# EAGLE board openusbfxs (EAGLE 5.03)
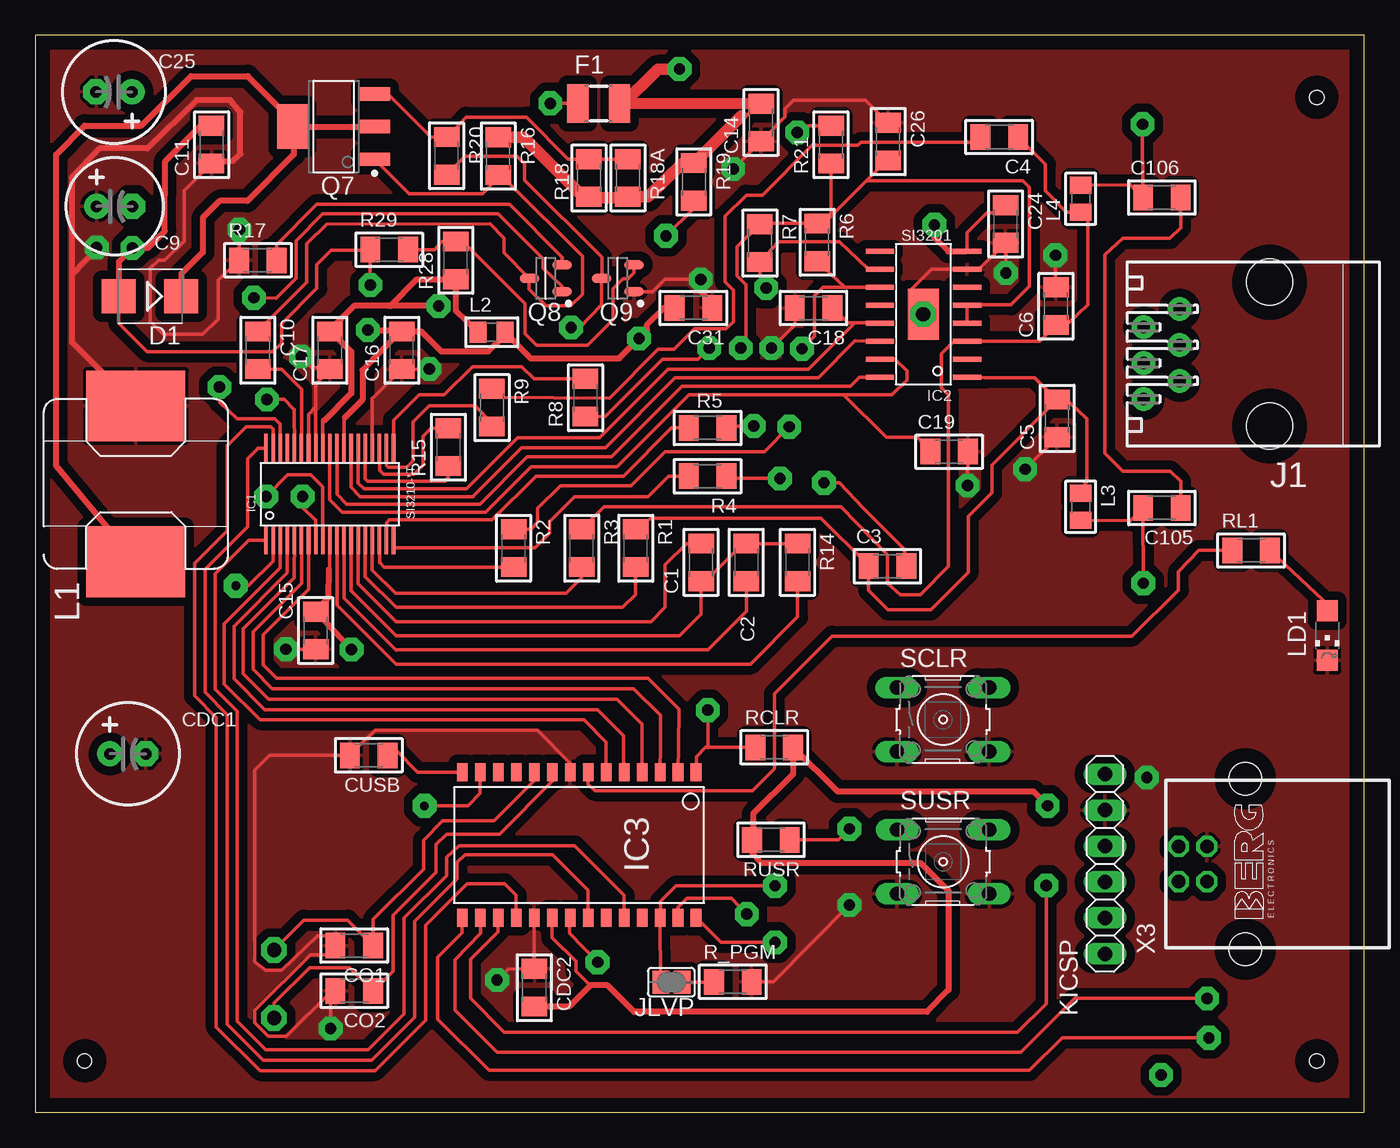
[diagram p0: board, top side]
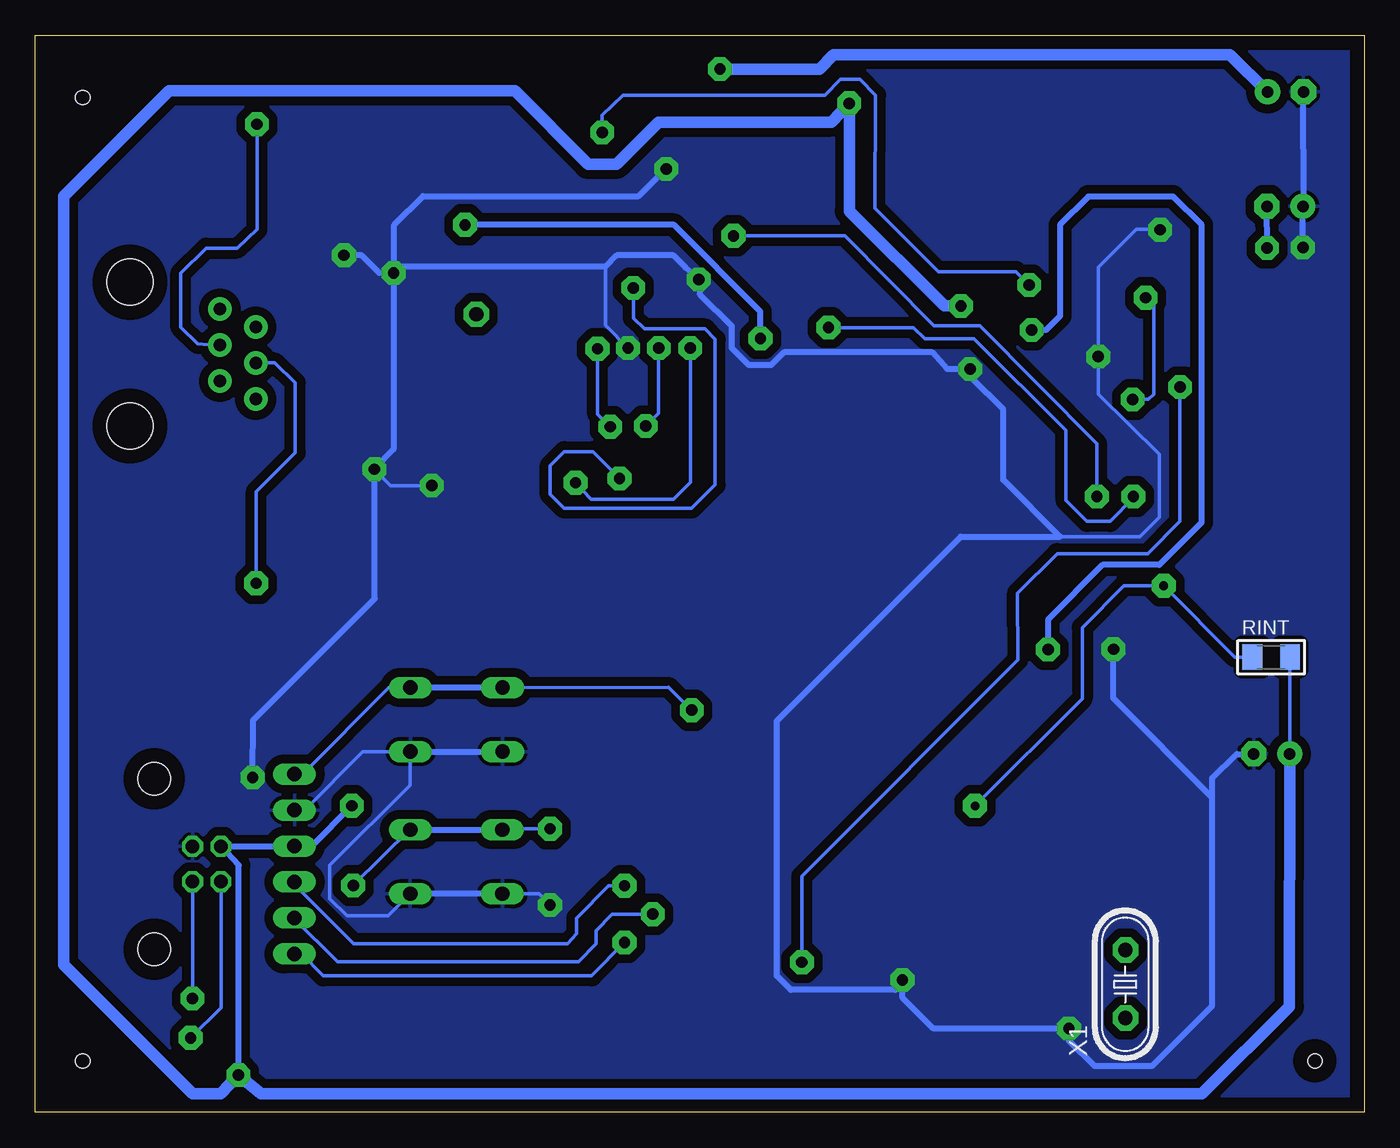
[diagram p1: board, bottom side, seen from below]

Size 93.81 x 76 mm. Coordinates in mm from the lower left corner, seen from the top.
Outline: 0,0 93.81,0 93.81,76 0,76 0,0
Copper layers (1*16): Top 0.035mm / dielectric 1.5mm / Bottom 0.035mm
Design rules "default": minimum track width 10mil, minimum drill 24mil, track to track 8mil, track to pad 8mil, pad to pad 8mil, via to via 8mil, smd to smd 8mil, copper to edge 40mil, drill to drill 8mil, minimum pad ring 10mil, minimum via ring 8mil, stop-mask expansion 4mil, vias tented up to drill 0mil, thermal gap 10mil
Holes 1 mm at 90.47,71.63 90.47,3.63 3.47,3.63

## Footprints (pad centres in the part's own frame; a part is rotated, then mirrored left to right if it is on the bottom)
C1206 = smd 1.4 x 1.8: 1 -1.329,0; 2 1.329,0
CE-025X060 = drill 0.813 pad 1.778 round: + -1.27,0 | drill 0.813 pad 1.778 octagon: - 1.27,0
CE-025X065 = drill 0.813 pad 1.778 round: + -1.27,0 | drill 0.813 pad 1.778 octagon: - 1.27,0
SMB = smd 2.4 x 2.4: A 2.2,0; C -2.2,0
1210 = smd 1.5 x 2.7: 1 -1.5,0; 2 1.45,0
TSSOP38-LP = smd 0.25 x 2: 1 -4.5,-3.25; 2 -4,-3.25; 3 -3.5,-3.25; 4 -3,-3.25; 5 -2.5,-3.25; 6 -2,-3.25; 7 -1.5,-3.25; 8 -1,-3.25; 9 -0.5,-3.25; 10 0,-3.25; 11 0.5,-3.25; 12 1,-3.25; 13 1.5,-3.25; 14 2,-3.25; 15 2.5,-3.25; 16 3,-3.25; 17 3.5,-3.25; 18 4,-3.25; 19 4.5,-3.25; 20 4.5,3.25; 21 4,3.25; 22 3.5,3.25; 23 3,3.25; 24 2.5,3.25; 25 2,3.25; 26 1.5,3.25; 27 1,3.25; 28 0.5,3.25; 29 0,3.25; 30 -0.5,3.25; 31 -1,3.25; 32 -1.5,3.25; 33 -2,3.25; 34 -2.5,3.25; 35 -3,3.25; 36 -3.5,3.25; 37 -4,3.25; 38 -4.5,3.25 | smd 0.25 x 1: P$25 -3.5,-2.75
ESOIC-16T = smd 0.35 x 2: 1 -4.445,-3.075; 2 -3.175,-3.075; 3 -1.905,-3.075; 4 -0.635,-3.075; 5 0.635,-3.075; 6 1.905,-3.075; 7 3.175,-3.075; 8 4.445,-3.075; 9 4.445,3.075; 10 3.175,3.075; 11 1.905,3.075; 12 0.635,3.075; 13 -0.635,3.075; 14 -1.905,3.075; 15 -3.175,3.075; 16 -4.445,3.075 | smd 3.6 x 2.2: THERMAL 0,0
SO-28W = smd 0.762 x 1.27: 1 -7.62,-5.207; 2 -6.35,-5.207; 3 -5.08,-5.207; 4 -3.81,-5.207; 5 -2.54,-5.207; 6 -1.27,-5.207; 7 0,-5.207; 8 1.27,-5.207; 9 2.54,-5.207; 10 3.81,-5.207; 11 5.08,-5.207; 12 6.35,-5.207; 13 7.62,-5.207; 14 8.89,-5.207; 15 8.89,5.08; 16 7.62,5.08; 17 6.35,5.08; 18 5.08,5.08; 19 3.81,5.08; 20 2.54,5.08; 21 1.27,5.08; 22 0,5.08; 23 -1.27,5.08; 24 -2.54,5.08; 25 -3.81,5.08; 26 -5.08,5.08; 27 -6.35,5.08; 28 -7.62,5.08
RJ-11/12 = drill 0.889 pad 1.676 round: 1 -3.175,7.747; 2 -1.905,5.207; 3 -0.635,7.747; 4 0.635,5.207; 5 1.905,7.747; 6 3.175,5.207 | hole 3.251: -5.08,-1.143; 5.08,-1.143
SJ = smd 1.168 x 1.6: 1 -0.762,0; 2 0.762,0
1X06 = drill 1.016 long: 1 -6.35,0; 2 -3.81,0; 3 -1.27,0; 4 1.27,0; 5 3.81,0; 6 6.35,0
SMD_SC = smd 5 x 7: P$1 -5.5,0; P$2 5.5,0
L0805 = smd 1.2 x 1.5: 1 -0.953,0; 2 0.953,0
CHIPLED_1206 = smd 1.5 x 1.5: A 0,-1.75; C 0,1.75
SOT230P700X160-4N = smd 2.15 x 0.95: 1 -2.9,2.3; 2 -2.9,0; 3 -2.9,-2.3 | smd 2.15 x 3.15: 4 2.9,0
SOT95P280X135-3N = smd 1.4 x 0.65: 1 -1.15,0.95; 2 -1.15,-0.95; 3 1.15,0
R1206 = smd 1.4 x 1.8: 1 -1.329,0; 2 1.329,0
B3F-10XX = drill 1.016 long: 1 -3.251,2.261; 2 3.251,2.261; 3 -3.251,-2.261; 4 3.251,-2.261
HC49/S = drill 0.813 round: 1 -2.413,0; 2 2.413,0
PN61729 = drill 0.95 octagon: 1 1.25,4.71; 2 -1.25,4.71; 3 -1.25,2.71; 4 1.25,2.71 | hole 2.3: -6.02,0; 6.02,0

## Placement (x,y rotation side)
C1  10uF/6V  [C1206]  47,38.81 90 top
C2  10uF/6V  [C1206]  50.19,38.81 270 top
C3  220nF/100V  [C1206]  60.16,38.54 0 top
C4  220nF/100V  [C1206]  68.05,68.83 180 top
C5  22nF/100V  [C1206]  72.13,48.97 90 top
C6  22nF/100V  [C1206]  72.05,56.89 90 top
C9  10uF/100V  [CE-025X060]  5.59,63.94 0 top
C10  100nF/50V  [C1206]  15.71,53.78 270 top
C11  100nF/100V  [C1206]  12.44,68.29 90 top
C14  100nF/25V  [C1206]  51.23,69.86 90 top
C15  100nF  [C1206]  19.79,34 90 top
C16  100nF  [C1206]  25.87,53.78 90 top
C17  100nF  [C1206]  20.79,53.78 90 top
C18  4.7uF/6V  [C1206]  54.94,56.76 180 top
C19  4.7uF/6V  [C1206]  64.51,46.62 0 top
C24  100nF  [C1206]  68.5,62.69 270 top
C25  10uF/25VTant  [CE-025X065]  5.55,72.02 180 top
C26  100nF/100V  [C1206]  60.2,68.5 270 top
C31  10uF/6V  [C1206]  46.45,56.77 180 top
C105  680pF/100V  [C1206]  79.53,42.65 180 top
C106  680pF/100V  [C1206]  79.53,64.56 0 top
CDC1  100uF/10VRadial  [CE-025X065]  6.52,25.3 0 top
CDC2  100nF/25V  [C1206]  35.23,8.79 270 top
CO1  22pF  [C1206]  22.51,11.76 180 top
CO2  22pF  [C1206]  22.51,8.57 180 top
CUSB  220nF  [C1206]  23.54,25.19 180 top
D1  ES1D  [SMB]  8.09,57.59 180 top
F1  1.25A  [1210]  39.74,71.2 180 top
IC1  SI3210-*T  [TSSOP38-LP]  20.79,43.62 0 top
IC2  SI3201  [ESOIC-16T]  62.7,56.32 90 top
IC3  PIC18F2550-I/SO  [SO-28W]  39.03,18.79 180 top
J1  [RJ-11/12]  85.99,53.51 90 top
JLVP  [SJ]  44.9,9.17 180 top
KICSP  [1X06]  75.52,17.52 270 top
L1  100uH*  [SMD_SC]  7.09,44.35 90 top
L2  BLM18AG601SN1  [L0805]  32.22,55.05 0 top
L3  BLM18AG601SN1  [L0805]  73.8,42.73 270 top
L4  BLM18AG601SN1  [L0805]  73.8,64.48 90 top
LD1  [CHIPLED_1206]  91.21,33.65 180 top
Q7  FZT953  [SOT230P700X160-4N]  21.06,69.56 180 top
Q8  MMBT2222A  [SOT95P280X135-3N]  36.03,58.86 180 top
Q9  MMBT2222A  [SOT95P280X135-3N]  41.11,58.86 180 top
R1  200k  [R1206]  42.38,39.81 270 top
R2  196k  [R1206]  33.76,39.81 270 top
R3  200k  [R1206]  38.57,39.81 270 top
R4  196k  [R1206]  47.46,44.89 180 top
R5  200k  [R1206]  47.46,48.3 180 top
R6  4.02k  [R1206]  55.19,61.4 270 top
R7  4.02k  [R1206]  51.15,61.34 270 top
R8  470  [R1206]  38.84,50.43 90 top
R9  470  [R1206]  32.24,49.73 270 top
R14  40.2k  [R1206]  53.81,38.81 270 top
R15  243  [R1206]  29.16,46.94 90 top
R16  200  [R1206]  32.68,67.48 270 top
R17  450*  [R1206]  15.71,60.13 0 top
R18  1/0.125W*  [R1206]  39.08,65.94 270 top
R18A  1/0.125W*  [R1206]  41.84,65.94 270 top
R19  18k  [R1206]  46.49,65.66 270 top
R20  18k  [R1206]  29.04,67.5 270 top
R21  15/0.25W  [R1206]  56.17,68.29 90 top
R28  37.4k*  [R1206]  29.68,60.13 90 top
R29  450k*  [R1206]  24.98,60.88 0 top
R_PGM  10k  [R1206]  49.24,9.21 0 top
RCLR  10k  [R1206]  52.16,25.76 0 top
RINT  10k  [R1206]  6.56,32.12 0 bottom
RL1  330  [R1206]  85.83,39.65 0 top
RUSR  10k  [R1206]  51.93,19.23 180 top
SCLR  [B3F-10XX]  64.08,27.71 0 top
SUSR  [B3F-10XX]  64.09,17.68 0 top
X1  20MHz  [HC49/S]  16.86,9.03 90 bottom
X3  [PN61729]  85.42,17.52 90 top

## Library data of the parts
C1-C6 C9-C11 C14-C19 C24-C26 C31 C105 C106 CDC1 CDC2 CO1 CO2 CUSB L2-L4 R1-R9 R14-R18 R18A R19-R21 R28 R29 R_PGM RCLR RINT RL1 RUSR = rc-master
D1 = diode
F1 = m-pad-2.0
IC1 IC2 = Silabs
IC3 = microchip-pic18fxx5x
J1 = connectors
JLVP = jumper
KICSP = pinhead
L1 = ShieldedChoke
LD1 = led
Q7-Q9 = ipc-7351-transistor
SCLR SUSR = switch-omron
X1 = crystal
X3 = con-berg

## Nets
!INT: IC1.2 IC3.13 RINT.1
!RESET: IC1.7 IC3.2
!SCS: IC1.1 IC3.24
+5V: C17.2 CDC1.+ CDC2.2 F1.2 IC1.30 IC3.20 KICSP.3 L2.1 R28.1 RCLR.2 RINT.2 RUSR.2 X3.1
DRX: IC1.4 IC3.5
DTX: IC1.5 IC3.4
FSYNC: IC1.6 IC3.3
GND: C5.1 C6.2 C9.+ C11.1 C14.1 C15.1 C16.1 C17.1 C18.2 C19.2 C24.2 C25.- C26.1 C31.1 CDC1.- CDC2.1 CO1.2 CO2.2 CUSB.2 IC1.23 IC1.31 IC1.32 IC2.7 IC3.8 IC3.19 KICSP.2 L1.P$2 LD1.C Q9.1 R17.1 R_PGM.2 SCLR.3 SCLR.4 SUSR.3 SUSR.4 X3.4
N$1: IC1.15 R1.2
N$2: IC1.17 R2.2
N$3: IC1.18 R5.2
N$4: IC1.19 R4.2
N$5: IC1.16 R3.2
N$6: IC2.11 R2.1 R6.2
N$7: IC2.10 R4.1 R7.2
N$8: IC1.28 IC2.16
N$9: IC1.26 IC2.14
N$10: C19.1 IC1.29 IC2.15
N$11: C18.1 IC1.25 IC2.13
N$12: IC3.15 X3.2
N$13: IC1.20 R8.2
N$14: IC1.21 R9.2
N$15: LD1.A RL1.2
N$16: C3.1 C5.2 IC2.1 L3.1 R1.1
N$17: C4.1 C6.1 IC2.3 L4.1 R3.1
N$18: C1.1 C2.1 IC1.13 R14.1
N$19: C1.2 IC1.14
N$20: C2.2 IC1.12
N$21: IC1.11 R14.2
N$22: C3.2 R8.1
N$23: C4.2 R9.1
N$24: IC1.24 R15.1
N$25: Q8.2 R17.2
N$26: C9.- C11.2 D1.A R21.2 R29.1
N$27: Q9.2 R28.2 R29.2
N$28: IC1.9 Q9.3 R20.2
N$29: IC1.8 R19.2
N$30: Q7.3 R18.1 R18A.1 R20.1
N$31: C14.2 C25.+ F1.1 R16.1 R18.2 R18A.2 R19.1
N$32: IC1.34 Q8.1
N$34: C10.2 IC1.33
N$35: IC3.16 X3.3
N$36: C10.1 Q7.1 Q8.3 R16.2
N$37: D1.C L1.P$1 Q7.2
N$38: IC3.28 KICSP.6
N$39: IC3.1 KICSP.1 RCLR.1 SCLR.1 SCLR.2
N$40: IC3.27 KICSP.5
N$41: IC3.26 JLVP.2 KICSP.4
N$42: JLVP.1 R_PGM.1
N$43: CO1.1 IC3.10 X1.2
N$44: CO2.1 IC3.9 X1.1
N$45: CUSB.1 IC3.14
N$46: C105.2 J1.3 L3.2
N$47: C106.1 J1.4 L4.2
N$48: IC3.7 RL1.1
N$50: IC3.17 RUSR.1 SUSR.1 SUSR.2
PCLK: IC1.3 IC3.6
PE: C105.1 C106.2
R15: IC1.22 R15.2
SCK: IC1.38 IC3.22
SDI: IC1.36 IC3.21
SDO: IC1.37 IC3.18
VBATH: C26.2 IC2.4 IC2.5 R5.1 R6.1 R7.1 R21.1
VCHK: C15.2 C16.2 C24.1 C31.2 IC1.10 IC1.27 IC2.8 L2.2

## Tracks (layer width: path | path; a pad name or v marks a point on that pad's centre or on a via)
!INT  (via drill 0.6 pad 1.68)
  Top 0.254: IC1.2 16.79,38.96 16.79,38.91 15.04,37.15 v14.16,37.15 | v27.47,21.63 30.47,21.63 30.54,21.63 31.41,22.5 IC3.13
  Bottom 0.254: v27.47,21.63 19.9,29.2 19.9,34.21 16.95,37.15 v14.16,37.15 9.12,32.12 RINT.1
!RESET
  Top 0.25: 19.29,37.12 IC1.7
  Top 0.254: IC3.2 45.42,25.86 45.45,28.43 43.27,30.63 17.02,30.63 16.07,31.58 16.07,33.69 19.29,36.91 19.29,37.12
!SCS
  Top 0.254: IC3.24 41.57,15.31 38.07,18.8 29.92,18.8 29.04,18 29.04,16.7 26.04,13.73 26.04,6.96 23.49,4.41 16.25,4.41 14.25,6.41 14.25,28.29 12.7,29.86 12.69,29.86 12.69,37.96 12.69,37.99 15.07,40.37 IC1.1
+5V  (via drill 0.8 pad 1.68)
  Top 0.2: 20.29,48.7 20.38,48.81 20.29,48.74
  Top 0.25: 20.29,48.74 IC1.30
  Top 0.254: 20.92,55.05 C17.2 20.74,55.16 | R28.1 29.67,58.73 | 25.07,56.93 25.12,56.91 24.95,56.91 | v36.34,71.2 F1.2 | 50.67,19.25 RUSR.2 50.59,18.3 | 36.47,13.63 IC3.20 36.47,13.73 36.47,12.31 38.17,10.66 38.17,9.96 39.14,8.96 39.14,8.93
  Top 0.406: 20.38,48.81 22.29,50.73 22.29,53.68 20.92,55.05 | L2.1 29.67,56.58 29.67,58.73 | R28.1 26.92,58.78 25.07,56.93 | 25.12,56.91 22.5,56.91 20.74,55.16 | v28.47,56.91 24.95,56.91 | v71.47,21.63 70.5,22.63 56.64,22.63 RCLR.2 53.49,23.86 50.67,21.05 50.67,19.25 | 50.59,18.3 51.27,17.61 62.47,17.61 64.47,15.63 64.47,8.63 62.95,7.08 42.27,7.08 40.39,8.96 39.14,8.96 | CDC2.2 37.67,7.46 39.14,8.93
  Bottom 0.254: KICSP.3 76.55,18.78 | 79.59,2.73 v79.47,2.63 | 36.32,71.23 v36.34,71.2 | RINT.2 5.23,25.32 CDC1.+
  Bottom 0.406: v79.47,2.63 79.47,17.4 79.45,17.42 X3.1 75.55,18.77 KICSP.3 | v71.47,21.63 74.3,18.78 76.55,18.78
  Bottom 0.813: v36.34,71.2 36.34,63.61 29.62,56.91 v28.47,56.91 | CDC1.+ 5.27,7.46 11.45,1.31 77.87,1.31 79.59,2.73 | v79.47,2.63 80.72,1.31 82.72,1.31 91.8,10.41 91.8,64.66 84.37,72.1 59.95,72.1 54.8,66.91 52.8,66.91 49.82,69.88 37.59,69.88 36.32,71.23
DRX
  Top 0.25: 17.79,38.53 IC1.4
  Top 0.254: IC3.5 41.52,23.98 41.52,26.58 39.7,28.4 16.2,28.4 14.02,30.58 14.03,30.59 14.03,34.3 17.79,38.06 17.79,38.53
DTX
  Top 0.25: 18.29,38.02 IC1.5
  Top 0.254: IC3.4 42.82,27.43 42.8,27.43 41.07,29.15 16.47,29.15 14.67,30.95 14.68,30.96 14.68,34.11 18.29,37.72 18.29,38.02
FSYNC
  Top 0.25: IC1.6 18.79,37.47 18.79,37.37
  Top 0.254: IC3.3 44.12,25.95 44.12,28 42.22,29.9 16.72,29.9 15.37,31.28 15.37,31.29 15.37,33.92 18.79,37.35 18.79,37.37
GND  (via drill 0.8 pad 1.68)
  Top 0.2: 23.79,50.38 | C17.1 20.81,52.42
  Top 0.25: 23.79,50.38 IC1.23 | 19.79,49.78 IC1.31 | 19.29,49.27 IC1.32
  Top 0.254: 47.92,57.01 C31.1 | 53.57,56.73 C18.2 53.62,56.73 53.62,55.58 v51.97,53.93 | v65.82,44.23 C19.2 | C5.1 72.07,47.58 v69.87,45.38 | v68.52,59.23 68.52,60.88 C24.2 68.37,61.23 66.62,59.48 IC2.7 65.69,59.51 63.27,59.51 61.74,57.98 | C6.2 72.02,58.38 v72.02,60.48 | 20.77,52.43 C17.1 19.47,52.63 v18.77,53.33 | 23.79,50.38 C16.1 v27.82,52.46 | Q9.1 43.57,57.91 44.45,58.78 v46.97,58.78 | v49.27,66.58 C14.1 51.22,68.5 52.92,70.25 52.92,70.83 53.52,71.43 58.62,71.43 C26.1 | IC3.8 37.74,24.63 35.45,26.95 23.97,26.95 22.14,25.18 CUSB.2 22.2,25.18 16.54,25.18 15.5,24.14 15.5,12.23 15.5,10.63 16.27,10.01 17.39,10.01 19.92,12.46 20.52,12.46 CO1.2 20.49,11.11 19.42,11.11 15.5,7.21 15.5,6.3 16.42,5.35 17.7,5.35 20.92,8.55 21.17,8.55 CO2.2 20.84,8.48 v20.84,5.91 | LD1.C 91.47,31.63 | R_PGM.2 52.12,9.21 v57.47,14.63 | v17.7,32.68 C15.1 | IC3.19 35.22,10.08 CDC2.1 33.37,10.11 v32.59,9.33 | v14.4,62.28 R17.1 14.32,60.08 12.92,58.71 12.92,55.98 11.82,54.91 9.02,54.91 8.12,55.83 8.12,59.55 8.7,60.13 9.15,60.13 10.5,61.48 10.5,65.03 C11.1 12.54,67.1 | L1.P$2 7.09,49.83 | 2.57,59.36 2.59,59.16 | 4.37,60.98 v4.32,61.03 | 20.81,52.42 19.79,51.4 19.79,49.78 19.29,49.27
  Top 0.406: 47.92,57.01 46.97,57.96 v46.97,58.78 | 12.54,67.1 13.97,67.16 14.47,67.63 14.47,70.58 13.75,71.43 11.37,71.43 7.89,68.03 4.54,68.03 2.57,65.95 2.57,59.36 2.57,54.38 L1.P$2 | 2.59,59.16 4.37,60.98
  Bottom 0.254: 53.57,59.68 53.57,55.53 51.95,53.88 v51.97,53.93 | v65.82,44.23 68.72,44.23 v69.87,45.38 69.87,45.43 | v68.52,59.23 69.52,59.23 | 68.5,59.23 68.47,59.23 68.07,59.68 | 46.87,58.73 v46.97,58.78 | v57.47,14.63 58.24,15.43 60.89,15.43 SUSR.3 | SUSR.4 67.34,15.46 67.37,15.43 68.92,13.88 71.8,13.88 73.03,15.07 73.03,17.45 67.37,23.08 67.36,25.48 SCLR.4 70.72,25.45 74.8,21.33 KICSP.2 | 20.84,5.05 v20.84,5.91 20.82,5.91 | 21.47,40.63 15.82,40.63 14.47,41.98 14.47,46.46 18.74,50.68 18.74,53.41 v18.77,53.33 18.77,59.63 16.07,62.3 14.4,62.3 v14.4,62.28 | v27.82,52.46 27.72,52.46 27.72,51.83 | 17.72,32.66 v17.7,32.68 | 7.69,25.28 CDC1.- | v32.59,9.33 32.49,9.28 33.12,8.63 | KICSP.2 75.17,21.33 KICSP.2
  Bottom 0.406: v46.97,58.78 47.92,59.63 48.77,60.48 52.77,60.48 53.57,59.68 68.07,59.68 | 69.52,59.23 70.77,60.48 v72.02,60.48 | 46.87,58.73 46.87,57.71 44.64,55.48 44.64,53.93 43.45,52.73 41.87,52.73 40.97,53.63 30.49,53.63 29.42,52.46 v27.82,52.46 | SCLR.4 67.52,25.43 SCLR.3 | v78.47,23.63 78.45,27.65 69.84,36.26 69.84,45.43 | 10.72,22.2 10.72,7.53 15,3.25 19.02,3.25 20.84,5.05 | v32.59,9.33 32.59,8.08 30.39,5.91 v20.84,5.91 | 27.72,51.83 25.47,49.61 25.47,44.63 21.47,40.63 28.47,40.63 41.47,27.63 41.47,9.63 40.47,8.63 33.12,8.63 | 10.72,22.2 17.72,29.23 17.72,32.66 | 10.72,22.2 10.72,23.58 8.97,25.28 7.69,25.28 | C25.- 4.27,63.93 C9.+ v4.32,61.03 | 69.87,45.43 68.52,46.78 v68.52,59.23 68.5,59.23 68.47,62.63 66.44,64.66 51.22,64.66 v49.27,66.58 | SUSR.4 67.37,15.43 60.89,15.43
  pour Top (isolate 0.61): 0.47,75.63 0.47,0.63 93.47,0.63 93.47,75.63
  pour Bottom (isolate 0.61): 0.47,75.63 0.47,0.63 93.47,0.63 93.47,75.63
N$1
  Top 0.2: 25.47,35.64 25.47,35.63
  Top 0.25: 23.29,37.8 IC1.15
  Top 0.254: R1.2 42.38,36.54 41.47,35.63 25.47,35.63 | 23.29,37.8 25.47,35.64
N$2
  Top 0.2: 24.29,38.81 24.29,38.8
  Top 0.25: 24.29,38.8 IC1.17
  Top 0.254: R2.2 24.62,38.48 24.29,38.81
N$3
  Top 0.2: 24.79,41.61 24.79,41.62
  Top 0.25: IC1.18 24.79,41.61
  Top 0.254: 24.79,41.62 24.98,41.8 32.23,41.8 35.34,44.89 41.52,44.9 44.92,48.3 46.1,48.31 R5.2 46.4,48.7 46.47,48.63
N$4
  Top 0.25: 25.29,39.83 IC1.19
  Top 0.254: R4.2 44.69,44.89 43.25,43.45 38.06,43.45 36.3,41.69 36.3,40.87 35.27,39.83 25.29,39.83
N$5
  Top 0.2: 25.42,36.63 25.43,36.63 | IC1.16 23.79,40.39
  Top 0.25: 23.79,38.25 IC1.16
  Top 0.254: R3.2 38.57,37.73 37.47,36.63 25.43,36.63 | 23.79,38.25 25.42,36.63
N$6  (via drill 0.8 pad 1.68)
  Top 0.254: R2.1 34.98,41.14 35.47,41.63 35.47,42.63 37.07,44.23 42.07,44.23 44.47,46.63 51.47,46.63 v53.22,48.38 | 57.17,58.23 R6.2 | IC2.11 59.57,58.23 57.17,58.23 | 57.17,58.23 55.62,58.23 55.02,57.63 55.02,54.78 v54.12,53.88
  Bottom 0.254: v54.12,53.88 54.12,49.28 v53.22,48.38
N$7  (via drill 0.8 pad 1.68)
  Top 0.254: IC2.10 59.67,59.53 58.77,59.53 56.77,61.43 52.47,61.43 R7.2 51.14,59.93 51.14,58.98 v51.59,58.18 | R4.1 49.02,44.73 v52.57,44.73
  Bottom 0.254: v51.59,58.18 51.59,56.05 50.82,55.28 46.52,55.28 45.82,54.55 45.82,44.28 47.47,42.63 56.47,42.63 57.47,43.61 57.47,45.63 56.47,46.63 54.45,46.63 v52.57,44.73
N$8
  Top 0.2: 21.29,43.61 21.28,43.61 21.29,43.61
  Top 0.25: 21.29,43.61 IC1.28
  Top 0.254: IC2.16 59.81,51.88 | 21.29,43.61 21.98,42.91 31.38,42.91 34.73,46.26 40.66,46.27 45.63,51.24 57.55,51.24 58.2,51.88 IC2.16 | IC2.16 59.64,51.88
N$9
  Top 0.2: 30.88,43.46 30.94,43.46 30.88,43.46
  Top 0.25: 22.29,44.1 IC1.26
  Top 0.254: IC2.14 59.48,54.41 59.47,54.43 57.88,54.45 55.27,51.85 45.17,51.84 40.25,46.91 34.34,46.91 30.88,43.46 22.94,43.46 22.29,44.1
N$10
  Top 0.2: 20.79,43.23 20.79,43.25 | 20.79,43.23 20.79,43.22 20.79,43.23
  Top 0.25: 20.79,43.23 IC1.29
  Top 0.254: C19.1 63.27,46.53 | C19.1 | C19.1 62.67,47.13 62.67,47.23 62.27,47.63 60.07,47.63 57.07,50.61 57.07,50.63 | 57.07,50.63 46.13,50.63 41.07,45.57 35,45.57 31.79,42.36 21.66,42.36 20.79,43.23 | 57.07,50.63 60.47,50.63 61.52,51.66 61.52,52.33 60.7,53.16 IC2.15
N$11
  Top 0.2: 22.79,44.4 22.79,44.41
  Top 0.25: 22.79,44.4 IC1.25
  Top 0.254: 57.85,55.71 54.57,52.43 44.67,52.43 39.83,47.6 34.03,47.6 30.45,44.02 23.2,44.02 22.79,44.41 | 56.32,56.78 C18.1 56.37,56.71 57.38,55.71 57.85,55.71 | IC2.13 59.59,55.71 57.85,55.71
N$12  (via drill 0.8 pad 1.68)
  Top 0.254: IC3.15 30.12,13.71 30.12,12.66 28.39,10.96 28.39,6.58 32.05,2.96 70.19,2.96 72.52,5.25 v82.84,5.25
  Bottom 0.254: v82.84,5.25 80.7,7.37 80.7,16.2 X3.2
N$13
  Top 0.2: 25.29,48.85
  Top 0.25: IC1.20 25.29,47.18 25.29,48.85
  Top 0.254: 38.97,51.53 R8.2 38.86,51.76 35.21,51.76 34.34,52.63 30.85,52.63 28.86,50.65 27.08,50.64 25.29,48.85
N$14
  Top 0.25: 24.79,45.62 IC1.21
  Top 0.254: R9.2 32.22,48.68 31.04,49.86 27.79,49.86 26.66,48.73 26.66,46.96 26.66,46 26.2,45.53 24.89,45.53 24.79,45.62
N$15
  Top 0.254: LD1.A 91.47,35.63 RL1.2
N$16
  Top 0.254: R1.1 43.47,41.93 55.47,41.93 58.67,38.73 C3.1 58.82,38.33 58.82,36.83 60.2,35.46 63.22,35.46 65.87,38.11 65.87,42.08 67.52,43.73 67.52,45.68 72.12,50.28 70.52,51.83 | 70.52,51.83 67.12,51.83 IC2.1 67.02,51.83 70.52,51.83 | 70.52,51.83 70.57,51.83 72.07,50.33 C5.2 72.09,50.13 73.05,50.08 74.25,48.93 74.25,44.61 L3.1
N$17
  Top 0.254: R3.1 40.16,42.73 56.87,42.73 60.17,39.33 60.17,37.33 61.07,36.53 62.47,36.53 64.47,38.53 64.47,50.63 63.97,51.13 63.97,53.53 64.82,54.38 IC2.3 | IC2.3 64.87,54.43 | IC2.3 66.77,54.43 70.92,54.43 71.97,55.48 C6.1 72.14,55.76 73,55.76 74.3,56.98 74.3,62.91 L4.1 72.8,63.53 71.32,65.03 71.32,66.91 69.39,68.83 C4.1
N$18
  Top 0.2: 25.46,33.62 25.47,33.63
  Top 0.25: 22.29,36.8 IC1.13
  Top 0.254: 53.86,40.14 | 53.86,40.14 R14.1 | 53.86,40.14 C2.1 50.08,40.14 49.57,39.63 49.47,39.63 47.32,37.48 C1.1 47,35.16 45.47,33.63 25.47,33.63 | 53.86,40.14 53.87,40.13 | 25.46,33.62 22.29,36.8
N$19
  Top 0.2: 22.79,37.33 22.79,37.3
  Top 0.25: 22.79,37.3 IC1.14
  Top 0.254: C1.2 45.98,40.14 44.47,38.63 44.47,35.63 43.47,34.63 25.47,34.63 22.79,37.3
N$20
  Top 0.2: 25.47,32.59 25.47,32.63
  Top 0.25: 21.79,36.28 IC1.12
  Top 0.254: C2.2 50.19,35.35 47.47,32.63 25.47,32.63 | 25.47,32.59 21.79,36.28
N$21
  Top 0.25: 21.29,35.77 IC1.11
  Top 0.254: R14.2 53.81,34.97 50.47,31.63 25.47,31.63 21.29,35.77
N$22  (via drill 0.8 pad 1.68)
  Top 0.254: R8.1 40.25,49.11 44.26,53.13 46.77,53.13 v47.57,53.93 | C3.2 61.47,38.53 61.37,39.73 58.47,42.63 56.77,44.43 v55.67,44.43
  Bottom 0.254: v47.57,53.93 47.57,44.48 48.77,43.28 54.57,43.28 v55.67,44.43
N$23
  Top 0.254: C4.2 66.67,68.8 66.34,68.45 58.3,68.45 58.07,68.25 54.84,68.25 51.32,64.73 50.2,64.73 48.7,63.23 48.7,58.61 49.27,58.03 49.27,55.8 48.74,55.28 46.52,55.28 45.09,53.86 43.95,53.86 40.55,50.41 32.64,50.45 32.27,50.99 R9.1
N$24
  Top 0.25: 23.28,44.73 IC1.24
  Top 0.254: R15.1 29.14,45.58 29.14,44.78 28.91,44.55 23.45,44.55 23.28,44.73
N$25
  Top 0.254: Q8.2 37.2,60.33 37.22,60.3 33.47,64.08 19.87,64.08 17.02,61.23 17.02,60.16 R17.2
N$26  (via drill 0.8 pad 1.68)
  Top 0.254: 11.65,69.6 C11.2 | 5.94,57.61 D1.A 5.89,57.53 5.89,55.68 7.89,53.68 16.77,53.68 17.37,54.28 17.37,55.66 19.86,58.15 19.86,59.82 20.89,60.86 23.64,60.86 R29.1 23.64,60.91 v23.64,58.38 | R21.2 54.59,69.63 v53.8,69.16
  Top 0.406: 11.65,69.6 9.17,67.12 9.15,62.18 7.96,61 v6.85,61 5.9,60.05 D1.A
  Bottom 0.254: v53.8,69.16 53.8,70.38 52.32,71.78 38.07,71.78 36.97,72.91 35.59,72.91 34.49,71.78 34.52,63.8 30.07,59.33 24.57,59.33 v23.64,58.38
  Bottom 0.406: v6.85,61 C9.-
N$27
  Top 0.254: Q9.2 42.27,59.26 41.84,58.83 41.49,58.83 40.8,58.13 40.8,55.93 38.97,54.13 35.39,54.13 34.57,54.96 34.57,57.05 30.09,61.53 R28.2 29.49,61.46 28.7,61.46 28.17,60.88 R29.2
N$28  (via drill 0.8 pad 1.68)
  Top 0.2: 20.29,44.03 20.27,44.13
  Top 0.25: IC1.9 20.29,44.03
  Top 0.254: v37.82,55.38 38.42,55.38 39.97,56.98 Q9.3 39.99,58.78 39.99,60.33 34.55,65.78 34.55,66.93 34.02,67.48 30.32,67.48 R20.2 | 20.27,44.13 19.42,45.01 17.82,45.01 16.29,43.43 v16.29,43.46
  Bottom 0.25: 21.04,43.18 21.04,48.13
  Bottom 0.254: 21.04,43.18 19.56,41.71 17.93,41.71 16.25,43.41 v16.29,43.46 | 21.04,48.13 27.54,54.61 31.02,54.61 31.82,55.38 v37.82,55.38
N$29  (via drill 0.8 pad 1.68)
  Top 0.2: 19.79,41.8 19.79,41.78
  Top 0.25: IC1.8 19.79,41.8
  Top 0.254: 19.79,41.78 18.87,42.68 v18.87,43.46 | R19.2 46.49,63.8 v44.52,61.86
  Bottom 0.254: v18.87,43.46 18.87,47.18 27.12,55.51 30.37,55.51 36.64,61.86 v44.52,61.86
N$30
  Top 0.254: R18A.1 38.99,67.25 R18.1 37.62,67.25 34.67,70.23 30.42,70.23 29.07,68.78 R20.1 27.92,68.83 24.87,71.88 24.04,71.88 Q7.3
N$31  (via drill 0.8 pad 1.68)
  Top 0.254: R18.2 39.24,64.53 38.7,64.58 | 51.09,71.18 C14.2 51.07,71.2 50.2,70.33 49.84,70.33 | R18A.2 41.89,64.53 | R19.1 46.52,66.98 45.67,66.98 | 41.32,71 F1.1
  Top 0.813: R16.1 34.47,68.8 38.7,64.58 | F1.1 51.09,71.18 | 41.89,64.53 39.24,64.53 | R18A.2 43.27,64.61 45.67,66.98 | 49.84,70.33 R19.1 | v45.47,73.63 43.95,73.6 41.32,71
  Bottom 0.254: C25.+ 6.79,71.98
  Bottom 0.813: v45.47,73.63 38.47,73.63 37.47,74.63 9.47,74.63 6.79,71.98
N$32  (via drill 0.8 pad 1.68)
  Top 0.2: 18.29,49.59 18.29,49.62
  Top 0.25: 18.29,49.62 IC1.34
  Top 0.254: 37.27,58.01 Q8.1 37.2,58.28 35.84,59.58 35.84,60.23 32.67,63.41 20.29,63.41 18.39,61.51 18.39,58.86 17.01,57.47 v15.42,57.48 | 18.29,49.59 17.57,50.3 v16.34,50.3
  Bottom 0.254: v16.34,50.3 15.25,50.3 14.85,50.68 14.85,56.91 v15.42,57.48
N$33  (via drill 1 pad 1.78)
  other vias: 62.69,56.32
N$34
  Top 0.2: 18.79,51.03
  Top 0.25: IC1.33 18.79,51.03
  Top 0.254: C10.2 17.37,52.46 18.79,51.03
N$35  (via drill 0.8 pad 1.68)
  Top 0.254: IC3.16 31.42,12.63 29.62,10.76 29.62,7.21 32.59,4.23 69.59,4.23 73.41,8.03 v82.72,8.03
  Bottom 0.254: X3.3 82.72,16.32 v82.72,8.03
N$36
  Top 0.254: Q8.3 33.09,60.66 33.09,61.68 32.09,62.71 20.57,62.68 19.14,61.28 19.14,58.57 15.59,55.02 C10.1 | Q8.3 | Q8.3 34.87,58.08 36.05,56.91 37.8,56.91 38.62,57.73 38.62,60.41 33.42,65.6 32.7,65.6 R16.2 32.67,65.95 31.57,64.83 26.37,64.83 Q7.1
N$37
  Top 0.254: 24.04,69.55 Q7.2 | 18.29,69.55 18.47,69.55 18.47,69.63
  Top 0.406: D1.C 10.29,59.18 11.82,60.69 11.82,63.13 13.01,64.33 14.97,64.33 18.24,67.6 18.29,69.55 | 18.47,69.55 24.04,69.55 | L1.P$1 1.47,45.63 1.47,67.58 3.47,69.63 7.47,69.63 11,73.13 15,73.13 18.47,69.63
N$38  (via drill 0.8 pad 1.68)
  Top 0.254: v52.22,11.98 48.39,11.98 46.67,13.73 IC3.28
  Bottom 0.254: KICSP.6 75.02,11.18 73.5,9.63 54.55,9.63 v52.22,11.98
N$39  (via drill 0.8 pad 1.68)
  Top 0.254: IC3.1 46.67,25.11 47.32,25.75 47.47,25.75 | RCLR.1 47.47,25.75 | 47.47,25.75 47.47,25.73 | 47.47,25.75 v47.47,28.38
  Bottom 0.254: SCLR.1 49.09,29.98 v47.47,28.38 | 67.52,29.95 68.87,29.95 74.92,23.88 76.55,23.88 KICSP.1
  Bottom 0.406: 67.52,29.95 SCLR.2 67.39,29.97 | SCLR.1 67.39,29.97 | 67.39,29.97 67.39,30
N$40  (via drill 0.8 pad 1.68)
  Top 0.254: IC3.27 45.37,14.48 45.99,15.11 49.14,15.11 v50.22,13.98
  Bottom 0.254: v50.22,13.98 53.09,13.98 54.24,12.81 54.24,11.88 55.47,10.63 72.47,10.63 75.57,13.71 76.5,13.71 KICSP.5
N$41  (via drill 0.8 pad 1.68)
  Top 0.254: v52.22,15.98 45.24,15.98 44.12,14.88 IC3.26 44.12,9.13 JLVP.2
  Bottom 0.254: v52.22,15.98 53.34,15.98 55.59,13.71 55.59,12.58 56.24,11.88 71.34,11.88 75.64,16.2 76.67,16.2 KICSP.4
N$42
  Top 0.254: R_PGM.1 47.87,9.18 JLVP.1
N$43  (via drill 1 pad 1.78)
  Top 0.254: CO1.1 22.04,13.56 18.95,13.56 v16.84,11.46 | IC3.10 35.22,23.38 32.4,20.55 28.74,20.55 27.39,19.2 27.39,17.15 23.84,13.61 23.84,11.73 CO1.1 | CO1.1 23.82,11.76
  Bottom 0.254: X1.2 v16.84,11.46
N$44  (via drill 1 pad 1.78)
  Top 0.254: v16.84,6.66 16.84,7.73 19.34,10.21 22.2,10.21 CO2.1 23.84,8.55 25.24,9.96 25.24,13.91 28.29,16.95 28.29,18.9 29.02,19.63 32.77,19.63 36.49,23.38 IC3.9
  Bottom 0.254: X1.1 v16.84,6.66
N$45
  Top 0.254: IC3.14 26.99,23.98 25.52,25.48 CUSB.1
N$46  (via drill 0.8 pad 1.68)
  Top 0.254: L3.2 77.32,41.76 78.27,42.71 C105.2 v78.22,37.33
  Bottom 0.254: v78.22,37.33 78.22,43.8 75.47,46.55 75.47,51.48 76.92,52.88 78.22,52.88 J1.3
N$47  (via drill 0.8 pad 1.68)
  Top 0.254: L4.2 77.32,65.45 78.17,64.5 C106.1 v78.17,69.73
  Bottom 0.254: v78.17,69.73 78.17,62.3 79.57,60.98 81.75,60.98 83.55,59.23 83.55,55.41 82.34,54.26 80.87,54.11 J1.4
N$48
  Top 0.254: IC3.7 39.02,23.15 39.49,22.7 50.64,22.7 52.17,24.23 52.17,29.53 56.24,33.61 77.42,33.61 80.69,36.86 80.69,38.16 82.14,39.66 84.37,39.66 RL1.1
N$49  (via drill 0.6 pad 1.68)
  other vias: 14.14,37.16
N$50  (via drill 0.8 pad 1.68)
  Top 0.254: IC3.17 32.67,12.76 30.72,10.78 30.72,8.05 33.09,5.66 69.34,5.66 71.37,7.66 v71.37,16 | RUSR.1 56.7,19.23 v57.47,20
  Bottom 0.254: SUSR.2 67.32,20 v71.37,16 | SUSR.1 60.89,20 v57.47,20
  Bottom 0.406: 67.42,19.93 SUSR.2 67.34,19.95 SUSR.1
PCLK
  Top 0.25: 17.29,39.11 IC1.3
  Top 0.254: IC3.6 40.3,24.03 40.3,26.13 38.72,27.7 15.87,27.7 13.35,30.18 13.34,30.2 13.34,34.48 17.29,38.43 17.29,39.11
PE
  Top 0.254: C105.1 80.87,44.53 80.12,45.26 76.8,45.26 75.52,46.51 75.52,60.51 76.77,61.68 80.09,61.68 80.87,62.43 80.84,64.16 C106.2
R15
  Top 0.2: 24.29,45.32 24.29,45.31
  Top 0.25: 24.29,45.32 IC1.22
  Top 0.254: 24.29,45.31 24.57,45.03 26.73,45.03 27.38,45.68 27.37,47.7 27.95,48.27 29.13,48.26 R15.2
SCK
  Top 0.2: 15.72,46.87 15.7,46.87
  Top 0.25: 14.97,46.13 15.72,46.87
  Top 0.254: IC3.22 39.02,15.68 36.52,18.18 30.32,18.18 29.77,17.63 29.77,16.48 26.77,13.48 26.77,6.71 23.74,3.68 16.07,3.68 13.54,6.21 13.54,28.05 11.97,29.63 11.97,38.33 14.97,41.33 14.97,46.13 | 15.7,46.87 IC1.38
SDI  (via drill 0.8 pad 1.68)
  Top 0.2: 17.29,48.55 17.29,48.58
  Top 0.25: 17.29,48.58 IC1.36
  Top 0.254: 17.29,48.55 16.89,48.96 14.25,48.96 13,50.11 v13,51.18 | IC3.21 37.7,13.78 37.7,12.63 v39.7,10.58
  Bottom 0.254: v13,51.18 13,41.71 15.27,39.43 21.67,39.43 24.47,36.63 24.45,31.93 39.7,16.65 v39.7,10.58
SDO
  Top 0.2: 16.79,48.19
  Top 0.25: 16.79,48.19 IC1.37
  Top 0.254: IC3.18 33.95,13.73 33.95,15.31 33.12,16.13 30.49,16.13 27.54,13.18 27.54,6.48 23.97,2.93 15.87,2.93 12.77,6 12.77,27.86 11.25,29.38 11.25,38.73 13.54,41.03 13.54,47.05 14.87,48.38 16.59,48.38 16.79,48.19
VBATH  (via drill 0.8 pad 1.68)
  Top 0.254: v49.8,53.93 50.17,54.34 50.17,58.41 49.55,59.03 49.55,61.08 R7.1 51.27,62.73 R6.1 55.62,62.68 56.22,63.28 | R5.1 48.77,48.43 v50.72,48.43 | IC2.4 65.77,56.98 IC2.5 66.42,56.98 68.87,56.98 70.17,58.28 70.17,65.28 69.72,65.73 58.67,65.73 | 56.22,63.28 58.67,65.73 | 56.22,63.28 56.17,63.33 R21.1 | C26.2 60.05,67.13 58.67,65.73
  Bottom 0.254: v49.8,53.93 49.8,49.35 v50.72,48.43
VCHK  (via drill 0.8 pad 1.68)
  Top 0.2: C15.2 19.78,35.38 | 21.85,49.04 21.79,48.98
  Top 0.254: C24.1 68.52,63.98 67.82,63.48 67.17,63.48 65.77,62.08 IC2.8 65.69,60.76 | 25.87,55.18 C16.2 25.74,55.21 | 33.14,54.83 L2.2 | v63.47,62.63 63.47,61.73 | v42.62,54.61 42.59,54.58 43.2,55.18 | C15.2 19.79,35.38 | 21.79,48.98 IC1.27 | 20.72,38.32 20.79,38.28 IC1.10
  Top 0.406: 21.85,49.04 23.09,50.28 23.09,52.38 25.87,55.18 | C16.2 27.24,55.11 28.64,53.71 31.98,53.71 33.14,54.83 | L2.2 34.97,53.21 41.22,53.21 42.59,54.58 | 63.47,61.73 64.45,60.76 65.69,60.76 | C31.2 44.37,56.76 43.2,55.58 43.2,55.18 | v23.47,55.21 25.74,55.21 | v22.32,32.66 C15.2 | 19.78,35.38 20.72,36.33 20.72,38.32
  Bottom 0.406: v42.62,54.61 42.62,56.51 48.72,62.63 v63.47,62.63 | v22.32,32.66 22.32,34.76 18.47,38.63 14.47,38.63 11.47,41.63 11.47,62.63 13.47,64.63 19.47,64.63 21.47,62.63 21.47,56.18 22.47,55.21 v23.47,55.21